# Altium PCB PracticaPCB.PcbDoc
Units mm, origin at the board's own origin, x right, y up, seen from the top; angles counter-clockwise.
Board outline 139.06 x 73.15 mm, 2 copper layers (Top Layer, Bottom Layer); 33 components, 23 nets, 90 pads, 37 vias.
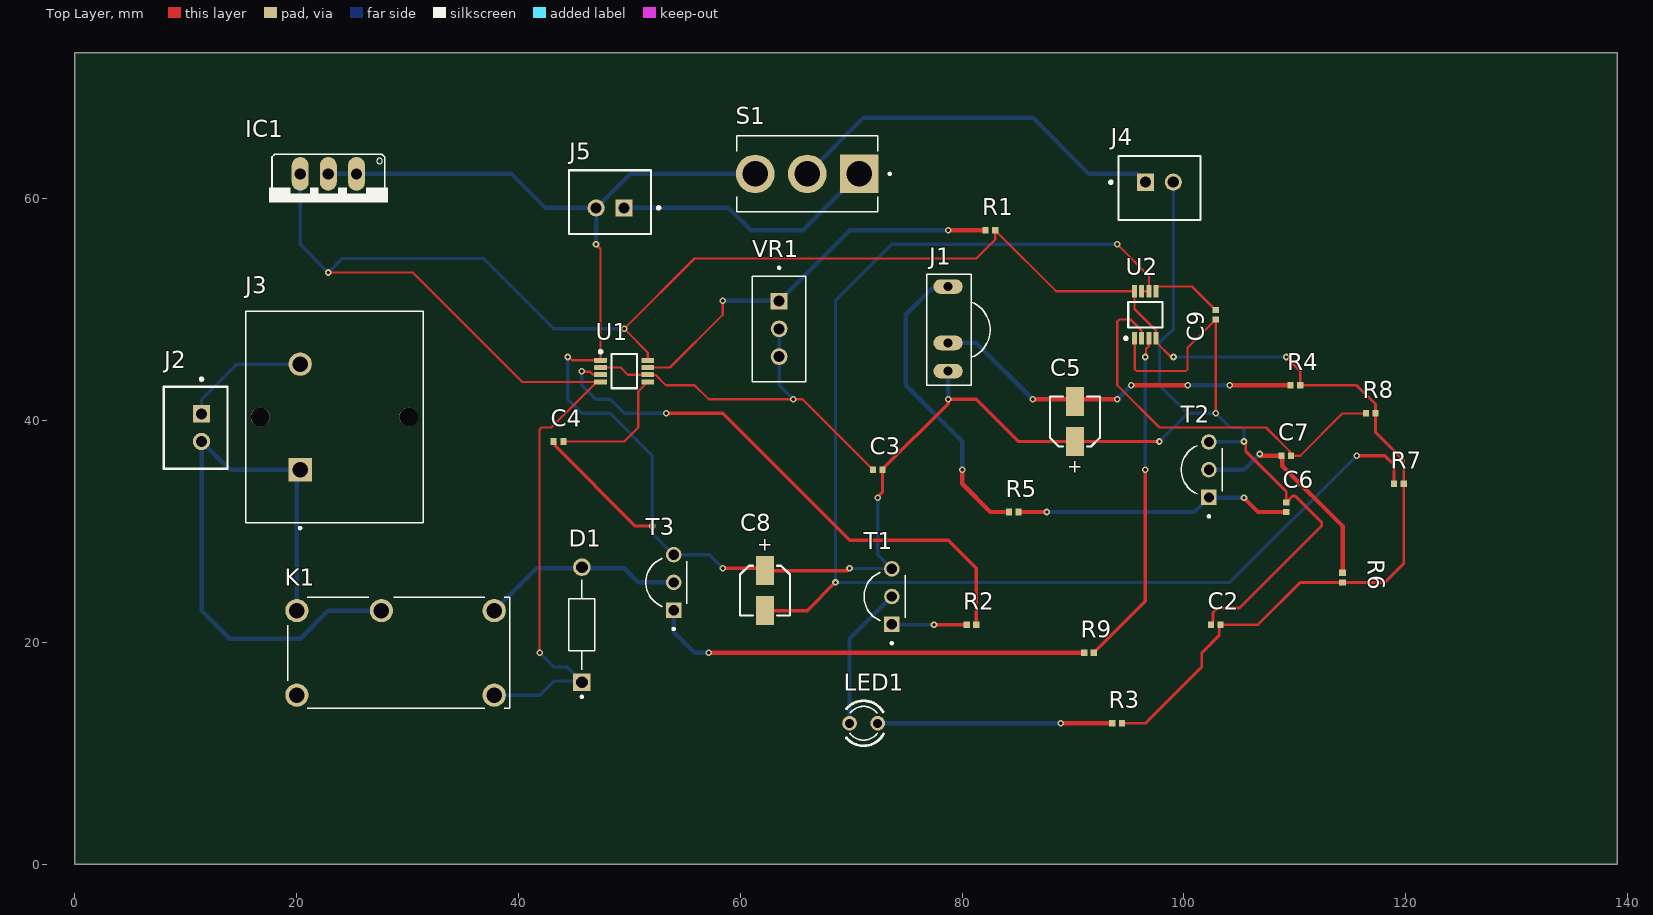
[diagram p0: Top Layer view]
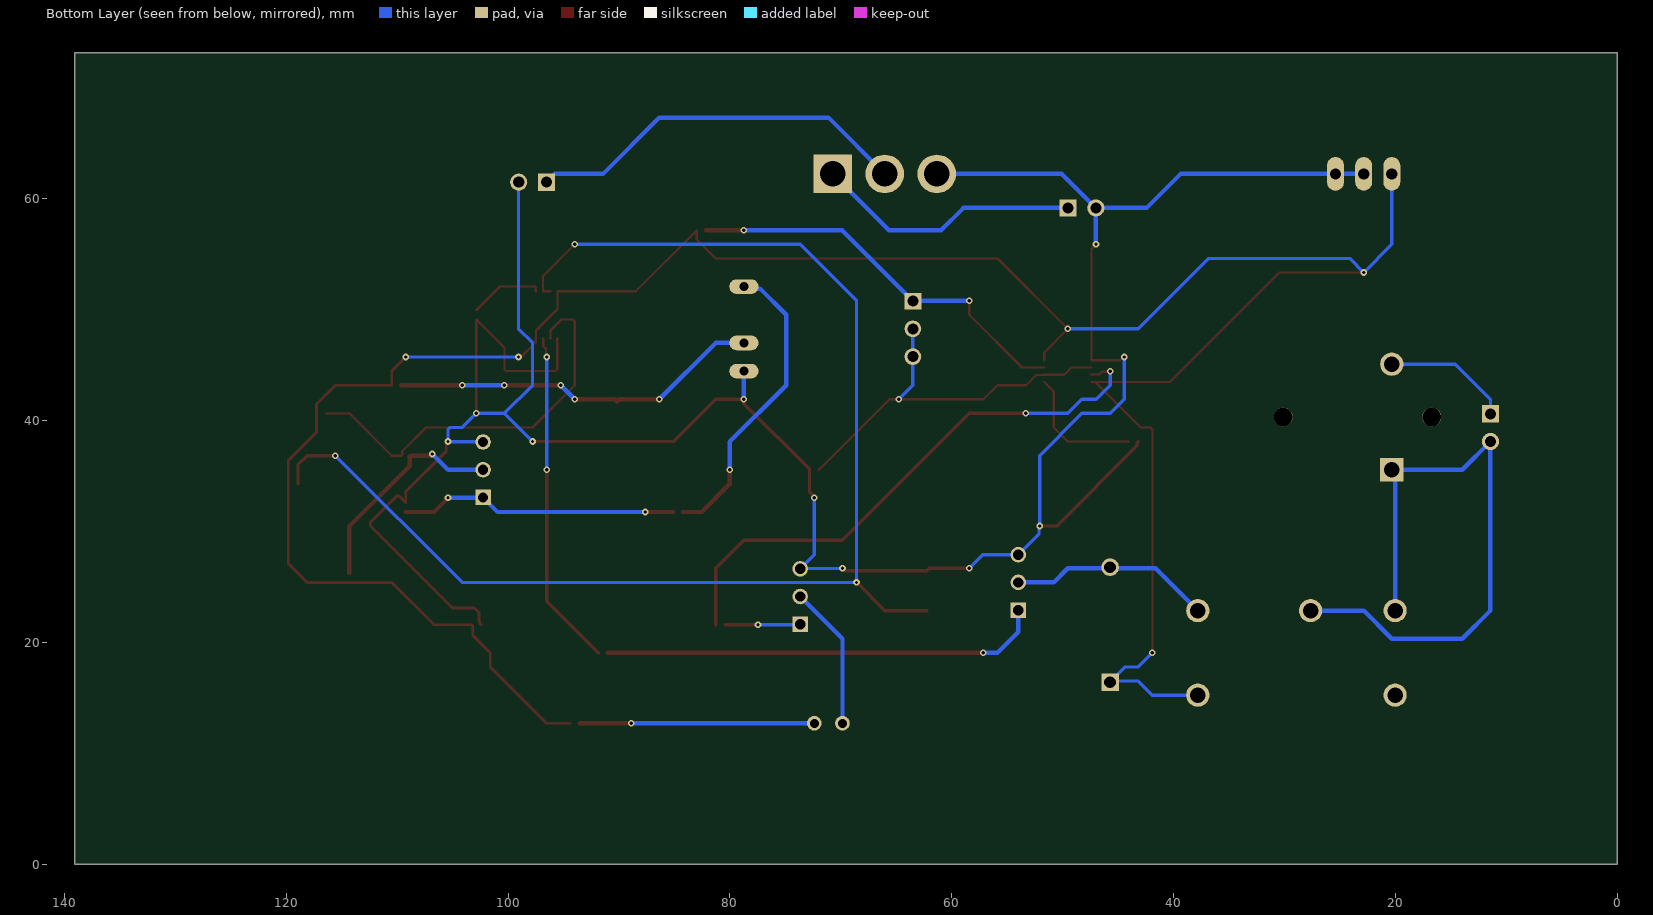
[diagram p1: Bottom Layer view, seen from below]
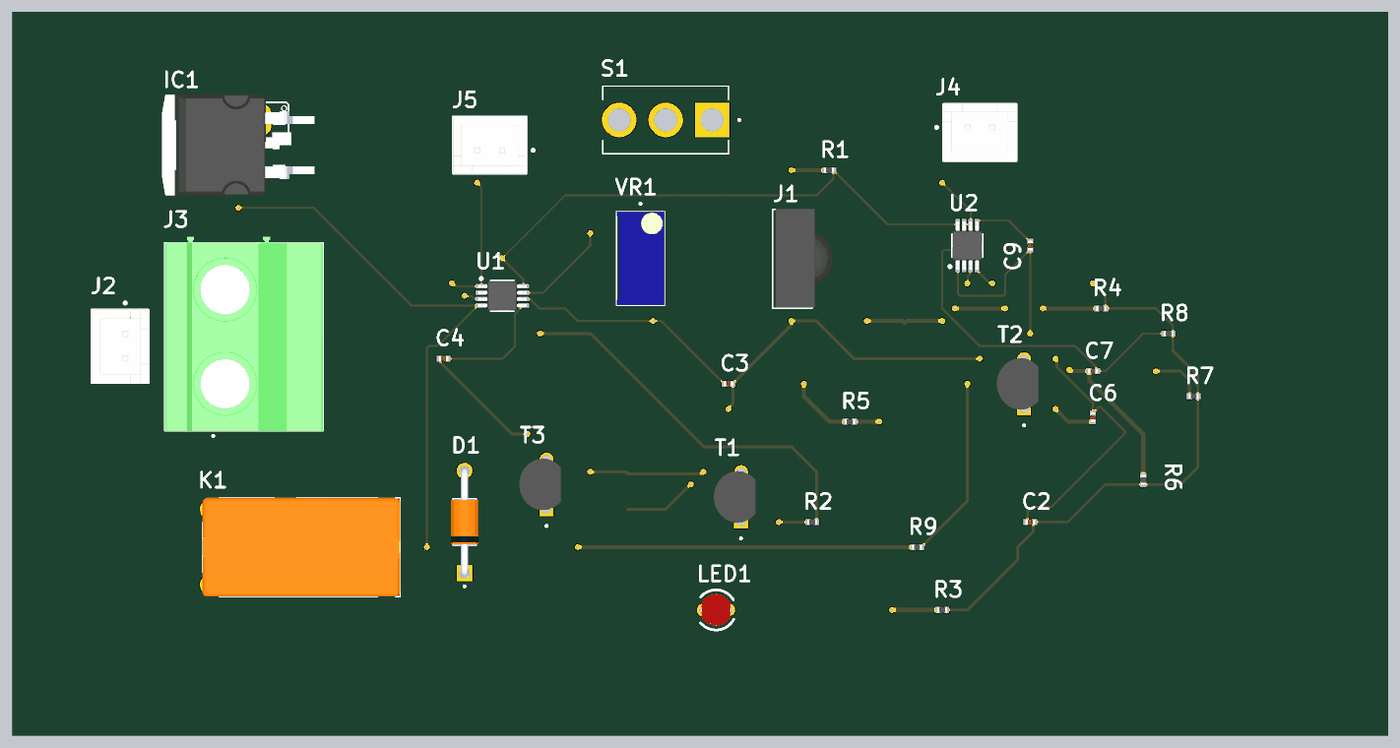
[diagram p2: 3D render of the assembled board from above, using the file's embedded part models]

## Layer stack, top to bottom
Top Solder: solder mask 0.0102, Solder Resist, Dk 3.5
Top Layer: signal copper 0.0356
Dielectric 1: dielectric 0.32, FR-4, Dk 4.8
Bottom Layer: signal copper 0.0356
Bottom Solder: solder mask 0.0102, Solder Resist, Dk 3.5

## Board outline
0,0 139.065,0 139.065,73.152 0,73.152

## Design rules (kind name [scope] priority, off if disabled: settings)
Clearance [All] p1: gap=0.3 ignorepadtopadclearanceinfootprint=FALSE
PolygonConnect [All] p1: connectstyle=Relief reliefconductorwidth=0.254 reliefentries=4 polygonreliefangle="90 Angle" airgapwidth=0.254
RoutingVias [All] p1: holewidth=0.3 width=0.6 viastyle="Through Hole" minholewidth=0.3 minwidth=0.6 maxholewidth=0.3 maxwidth=0.6
SilkToSolderMaskClearance [IsPad] p1: minsilkscreentomaskgap=0.1 clearancetoexposedcopper=TRUE
SolderMaskExpansion [All] p1: expansion=0.102 istentingtop=FALSE
SupplyNets "Schematic Supply Nets" [InNet('GND')] p1: voltage=0.000
Width [All] p1: maxlimit=0.7 minlimit=0.2 preferedwidth=0.4 minimp=50.000000 maximp=50.000000 favimp=50.000000
29 further rules are at their usual default settings.

## Components (designator, comment, footprint, x,y, rotation, side; value= is the part's Value field where it differs from the comment)
C2 "Capacitor" CAPC1005X55N 102.87,21.59 r0 top value=1p
C3 "Capacitor" CAPC1005X55N 72.39,35.56 r180 top value=1p
C4 "Capacitor" CAPC1005X55N 43.612,38.1 r0 top value=1p
C5 "100u/16V" WCAP-ASLI_D4H5.5 1360.17,-1230.1 r270 top
C6 "Capacitor" CAPC1005X55N 109.22,32.182 r270 top value=1p
C7 "Capacitor" CAPC1005X55N 109.22,36.83 r0 top value=1p
C8 "100u/16V" WCAP-ASLI_D4H5.5 -1207.77,1294.66 r90 top
C9 "Capacitor" CAPC1005X55N 102.87,49.53 r90 top value=1p
D1 "1N4001" DIOAD1036W78L470D235 45.72,21.59 r90 top
IC1 "7805" 78XXS 22.86,59.69 r180 top
J1 "TSOP1738" TSOP17XX 78.74,48.26 r90 top
J2 "B2B-XH-A(LF)(SN)" FP-B2B-XH-A_LF_SN-MFG 10.905,39.35 r270 top
J3 "SOLE-NOID VALVE" PHOENIX_1904147 31.42,30.8 r90 top
J4 "B2B-XH-A(LF)(SN)" FP-B2B-XH-A_LF_SN-MFG 97.79,60.96 r0 top
J5 "B2B-XH-A(LF)(SN)" FP-B2B-XH-A_LF_SN-MFG 48.26,59.69 r180 top
K1 "PE514005" RELAY_PE514005 29.21,19.05 r180 top
LED1 "IR" LED3MM 71.12,12.7 r180 top
R1 "Resistor" RESC1005X40N 82.55,57.15 r0 top value=1K
R2 "Resistor" RESC1005X40N 80.845,21.59 r0 top value=1K
R3 "Resistor" RESC1005X40N 93.98,12.7 r0 top value=1K
R4 "Resistor" RESC1005X40N 110.055,43.18 r0 top value=1K
R5 "Resistor" RESC1005X40N 84.655,31.75 r180 top value=1K
R6 "Resistor" RESC1005X40N 114.3,25.835 r270 top value=1K
R7 "Resistor" RESC1005X40N 119.38,34.29 r0 top value=1K
R8 "Resistor" RESC1005X40N 116.84,40.64 r0 top value=1K
R9 "Resistor" RESC1005X40N 91.44,19.05 r180 top value=1K
S1 "10V" SW_A101SYZQ04 66.04,62.23 r180 top
T1 "BC548" TO92250P510H770-3 73.005,24.13 r90 top
T2 "BC548" TO92250P510H770-3 101.6,35.56 r90 top
T3 "BC548" TO92250P510H770-3 53.34,25.4 r90 top
U1 "LMC555CMM/NOPB" DGK0008A_L 49.53,44.45 r0 top
U2 "LMC555CMM/NOPB" DGK0008A_L 96.52,49.53 r90 top
VR1 "20K" TRIM_PV36W203C01B00 63.5,48.26 r270 top

## Footprints (in the part's own frame and the unit in brackets; to place one, negate y for a bottom-side part, rotate by r counter-clockwise, add the part's x,y. Pads: shape width x height; smd on the part's side, far side on the other; paste and mask are expansions set on the pad)
78XXS [mil]
  oval 60x120 hole 40: GND(0,-100) IN(-100,-100) OUT(100,-100)
  silkscreen extent -210,-170 210,0, body extent -304,-201 304,201, height 181
CAPC1005X55N [mm]
  rect 0.54x0.6 smd: 1(-0.432,0) 2(0.432,0)
  body extent -0.5,-0.25 0.5,0.25, height 0.55
DGK0008A_L [mm] "TSOP, 8-Leads, Body 3.1x3.1mm, Pitch 0.65mm, IPC High Density"
  rrect22% 1.15x0.45 smd: 1(-2.125,0.975) 2(-2.125,0.325) 3(-2.125,-0.325) 4(-2.125,-0.975) 5(2.125,-0.975) 6(2.125,-0.325) 7(2.125,0.325) 8(2.125,0.975)
  silkscreen extent -2.25,-1.55 1.15,1.87, body extent -2.45,-1.5 2.45,1.5, height 0.94
DIOAD1036W78L470D235 [mm]
  round 1.59 hole 1.06: A(5.18,0)
  rect 1.59x1.59 / inner round 1.59 / far side rect 1.59x1.59 hole 1.06: C(-5.18,0)
  silkscreen extent -6.6,-1.17 4.07,1.17, body extent -5.55,-1.4 5.55,1.4, height 2.8
FP-B2B-XH-A_LF_SN-MFG [mm]
  rect 1.55x1.55 hole 1 paste-2539.97 mask+0: 1(-1.25,0.525)
  round 1.55 hole 1 paste-2539.97 mask+0: 2(1.25,0.525)
  silkscreen extent -4.5,-2.88 3.7,2.88, body extent -3.8,-2.98 3.8,2.98, height 0.25
LED3MM [mil]
  round 52 hole 32: A(-50,0) K(50,0)
  silkscreen extent -71,-80 61,80, body extent -60,-62 60,62, height 240
PHOENIX_1904147 [mm]
  rect 2.1x2.1 / inner round 2.1 / far side rect 2.1x2.1 hole 1.4: 1(4.76,11.1)
  round 2.1 hole 1.4: 2(14.28,11.1)
  round 1.7 hole 1.7 unplated: ""(9.52,14.7) ""(9.52,1.3)
  silkscreen extent -0.6,0 19.04,16, body extent 0,0 19.61,16, height 21.7
RELAY_PE514005 [mm]
  round 2.1 hole 1.4: 11(1.56,-3.81) 12(9.18,3.81) 14(9.18,-3.81) A1(-8.6,-3.81) A2(-8.6,3.81)
  silkscreen extent -10,-5 10,5, body extent -10,-5 10,5, height 10
RESC1005X40N [mm]
  rect 0.56x0.6 smd: 1(-0.435,0) 2(0.435,0)
  body extent -0.5,-0.25 0.5,0.25, height 0.37
SW_A101SYZQ04 [mil]
  rect 137x137 / inner round 137 / far side rect 137x137 hole 91: 1(-185,0)
  round 137 hole 91: 2(0,0) 3(185,0)
  silkscreen extent -297,-135 250,135
TO92250P510H770-3 [mm]
  rect 1.4x1.4 / inner round 1.4 / far side rect 1.4x1.4 hole 0.93: 1(-2.5,-0.655)
  round 1.4 hole 0.93: 2(0,-0.655) 3(2.5,-0.655)
  silkscreen extent -4.3,-1.85 2.18,1.85, body extent -2.6,-2.1 2.6,2.09, height 5.33
TRIM_PV36W203C01B00 [mm]
  rect 1.508x1.508 / inner round 1.508 / far side rect 1.508x1.508 hole 1: 1(-2.5,0)
  round 1.508 hole 1: 2(0,0) 3(2.5,0)
  silkscreen extent -5.6,-2.41 4.76,2.42, body extent -4.76,-2.41 4.76,2.42, height 11.55
TSOP17XX [mil]
  oval 52x104 hole 32: GND(-150,0) OUT(150,0) V+(-50,0)
  silkscreen extent -200,-149 194,75, body extent -197,-165 197,63, height 1224
WCAP-ASLI_D4H5.5 [mm] "Aluminium Electrolytic V-Chip SMT Capacitors, 4x5.5mm"
  rect 2.6x1.6 smd: 1(-1268.2,-1270) 2(-1271.8,-1270)
  silkscreen extent -1272.25,-1272.25 -1267.75,-1267.75, body extent -1272.5,-1272.15 -1267.5,-1267.85, height 5.5

## Part data
C5 C8: library part a00bbbee19879c290e62620ae7e47b1, "15uF 6.3V  ±20% 3.5Ω 1206  SMD Tantalum Capacitor", Capacitance=15uF, Capacitor Type=Aluminium, Case Code (Imperial)=1206, Case Code (Metric)=3216, Dielectric Material=Tantalum, ESR (Equivalent Series Resistance)=4R, Leakage Current=900nA, Manufacturer="Wurth Electronics", Manufacturer Part Number=865080340001, Max Operating Temperature=125°C, Min Operating Temperature=-55°C, Package Quantity=2500, Supplier Part Number=732-8411-1-ND, Tolerance=20%, Voltage Rating=6.3V, Case/Package=1206, Category="Aluminum Electrolytic Capacitors", ComponentLink1Description=https://datasheet.ciiva.com:443/pdfs/VipMasterIC/IC/MIDC/MIDC-S-A0000770067/MIDC-S-A0000769932-1.pdf?src-supplier=IHS+Markit, ComponentLink1URL=https://datasheet.ciiva.com:443/pdfs/VipMasterIC/IC/MIDC/MIDC-S-A0000770067/MIDC-S-A0000769932-1.pdf?src-supplier=IHS+Markit, ComponentLink2Description=http://www.farnell.com/datasheets/1880118.pdf?src-supplier=Farnell, ComponentLink2URL=http://www.farnell.com/datasheets/1880118.pdf?src-supplier=Farnell, ComponentLink3Description=https://katalog.we-online.de/pbs/datasheet/865080340001.pdf?src-supplier=Digikey, ComponentLink3URL=https://katalog.we-online.de/pbs/datasheet/865080340001.pdf?src-supplier=Digikey, ComponentLink4Description=http://www.farnell.com/datasheets/1880118.pdf?src-supplier=Element14, ComponentLink4URL=http://www.farnell.com/datasheets/1880118.pdf?src-supplier=Element14, ComponentLink5Description=http://www.farnell.com/datasheets/1880118.pdf?src-supplier=Newark, ComponentLink5URL=http://www.farnell.com/datasheets/1880118.pdf?src-supplier=Newark, Construction=Flat, Depth=1.6mm, Dissipation Factor=8%, Features="General Purpose", Height=1.2mm, Height - Seated (Max)=0.047inch, Lead Free="Lead Free", Length=3.2mm, Mount="Surface Mount", Number of Pins=2, Packaging="Tape and Reel", Pins=2, Polarity=Polar, Pricing="1=0,18, 50=0,156, 100=0,135, 250=0,121, 500=0,105, 1000=0,1 (USD)", Radiation Hardening=No, Reach SVHC Compliant=Yes, RoHS=Yes, RoHS Compliant=Yes, Series=TAJ, Stock=3909, Supplier=Digikey, Termination=SMD/SMT, Voltage Rating (DC)=6.3V, Weight=0.000571oz, Width=0.063inch
D1: Manufacturer=Good-Ark, Supplier Part Number=4786-1N4001CT-ND, Manufacturer Part Number=1N4001, Pricing="1=0,15, 10=0,09, 100=0,0557, 500=0,0403, 1000=0,03531, 2000=0,03109 (USD)", RoHS=No, Stock=12684, Supplier=DigiKey
IC1: library part IC1, "Fixed Positive Standard Regulator, 5VBIPolar, PSSO2", Case/Package=TO-252, Dropout Voltage1-Nom=2V, Input Voltage Absolute-Max=35V, Manufacturer=onsemi, Manufacturer Part Number=MC7805BDTG, Max Supply Voltage=20V, Min Input Voltage=7.5V, Operating Temperature, TJ-Max=125°C, Operating Temperature, TJ-Min=-40°C, Output Current1-Max=1A, Output Voltage1-Max=5.25V, Output Voltage1-Min=4.75V, Output Voltage1-Nom=5V, Package Body Material=Plastic, Package Equivalence Code=SMSIP3H,.38,90TB, Package Shape=Rectangular, Peak Reflow Temperature (Cel)=260°C, Supplier Part Number=9503160, Time @ Peak Reflow Temperature-Max (s)=40s, Voltage Tolerance-Max=5%, Adjustability=FIXED, Category="Voltage Regulators - Linear", Channels=1, ComponentLink1Description=https://datasheet.ciiva.com:443/pdfs/VipMasterIC/IC/ONSM/ONSM-S-A0009067490/ONSM-S-A0009067422-1.pdf?src-supplier=IHS+Markit, ComponentLink1URL=https://datasheet.ciiva.com:443/pdfs/VipMasterIC/IC/ONSM/ONSM-S-A0009067490/ONSM-S-A0009067422-1.pdf?src-supplier=IHS+Markit, ComponentLink2Description=https://datasheet.ciiva.com/1512/1726421-1512154.pdf?src-supplier=Element14, ComponentLink2URL=https://datasheet.ciiva.com/1512/1726421-1512154.pdf?src-supplier=Element14, ComponentLink3Description=https://datasheet.ciiva.com/18428/70100553-18428182.pdf?src-supplier=Allied+Electronics, ComponentLink3URL=https://datasheet.ciiva.com/18428/70100553-18428182.pdf?src-supplier=Allied+Electronics, Height - Seated (Max)=2.51mm, JESD-30 Code=R-PSSO-G2, JESD-609 Code=e3, Length=6.54mm, Moisture Sensitivity Level=1, Number of Outputs=1, Packaging=Rail/Tube, Pins=2, Pricing="75=0,115, 750=0,111, 2250=0,109, 9375=0,106, 22500=0,103 (USD)", Qualification Status="Not Qualified", Reach SVHC Compliant=No, Regulator Type="FIXED POSITIVE SINGLE OUTPUT STANDARD REGULATOR", RoHS=Yes, RoHS Compliant=Yes, Stock=3900, Supplier="Future Electronics", Surface Mount=Yes, Technology=BIPOLAR, Terminal Finish=Tin, Terminal Form="Gull Wing", Terminal Pitch=2.29mm, Terminal Position=SINGLE, Width=6.095mm
J1: "IR Remote Receiver 38KHz 35m 3-Pin", Package="DIP-3 Vishay", Availability="Not in stock", Check_prices=https://www.snapeda.com/parts/TSOP1738./Vishay/view-part/?ref=eda, MF=Vishay, MP=TSOP1738., Price=None, SnapEDA_Link=https://www.snapeda.com/parts/TSOP1738./Vishay/view-part/?ref=snap
J2 J4 J5: library part CON2, "CONN HEADER VERT 2POS 2.5MM", Color=Natural, Contact Resistance=20mR, Current Rating=3A, Housing Color=White, Insulation Resistance=1GR, Max Operating Temperature=85°C, Max Voltage Rating (AC)=250V, Min Operating Temperature=-25°C, Connector Type="Male Pin", Contact Material=Brass, Contact Plating=Tin, Contact Type="Male Pin", Depth=5.75mm, Fastening Type=Detent, Housing Material=Polyamide, Lead Free="Lead Free", Lead Pitch=2.5mm, Length=7.4mm, Max Current Rating=3A, Max Voltage Rating (DC)=250V, Mount="Through Hole", Number of Contacts=2, Number of Positions=2, Number of Rows=1, Orientation=Straight, Packaging=Bulk, Pitch=2.5mm, REACH SVHC="No SVHC", Series=XH, Termination=Solder, Voltage Rating=250V, Voltage Rating (AC)=250V, Wire/Cable Gauge=22AWG
J3: "PCB Terminal Screw 9.52mm 10AWG 1000V 32A 2 Position Combicon Power Series", Package=None, Check_prices=https://www.snapeda.com/parts/1904147/Phoenix+Contact/view-part/?ref=eda, MF="Phoenix Contact", MP=1904147, SnapEDA_Link=https://www.snapeda.com/parts/1904147/Phoenix+Contact/view-part/?ref=snap
K1: "Shrack, Relay,miniature,PCB,SPDT,5A,5Vdc coil, 1-1393219-7", Package=None, Check_prices=https://www.snapeda.com/parts/PE514005/TE+Connectivity/view-part/?ref=eda, MF="TE Connectivity", MP=PE514005, SnapEDA_Link=https://www.snapeda.com/parts/PE514005/TE+Connectivity/view-part/?ref=snap
LED1: library part LED, "LED SM 0603 3V -/1000/-MCD GREEN", Manufacturer="Visual Communications", Manufacturer Part Number=LSM0603453V, Supplier Part Number=LSM0603453VCT-ND, Category=LEDs, ComponentLink1Description=https://datasheet.ciiva.com:443/pdfs/VipMasterIC/IC/VISU/VISU-S-A0009188582/VISU-S-A0009188582-1.pdf?src-supplier=IHS+Markit, ComponentLink1URL=https://datasheet.ciiva.com:443/pdfs/VipMasterIC/IC/VISU/VISU-S-A0009188582/VISU-S-A0009188582-1.pdf?src-supplier=IHS+Markit, ComponentLink2Description=http://www.farnell.com/datasheets/2699708.pdf?src-supplier=Farnell, ComponentLink2URL=http://www.farnell.com/datasheets/2699708.pdf?src-supplier=Farnell, ComponentLink3Description=http://www.farnell.com/datasheets/2699708.pdf?src-supplier=Newark, ComponentLink3URL=http://www.farnell.com/datasheets/2699708.pdf?src-supplier=Newark, ComponentLink4Description=https://vcclite.com/wp-content/uploads/wpallimport/files/files/LSM0603453V.pdf?src-supplier=Digikey, ComponentLink4URL=https://vcclite.com/wp-content/uploads/wpallimport/files/files/LSM0603453V.pdf?src-supplier=Digikey, Optoelectronic Device Type="SINGLE COLOR LED", Pricing="1=0,5, 10=0,291, 100=0,1218, 500=0,1086, 1000=0,1071 (USD)", Reach SVHC Compliant=Yes, RoHS=Yes, RoHS Compliant=Yes, Stock=23373, Supplier=Digikey
S1: library part switch, "Toggle Switch", Manufacturer=E-Switch, Manufacturer Part Number=100SP2T1B1M1QEH, Supplier Part Number=EG2373-ND, Category="Toggle Switches", ComponentLink1Description=https://datasheet.ciiva.com:443/pdfs/VipMasterIC/IC/ESCH/ESCH-S-A0000009934/ESCH-S-A0000009793-1.pdf?src-supplier=IHS+Markit, ComponentLink1URL=https://datasheet.ciiva.com:443/pdfs/VipMasterIC/IC/ESCH/ESCH-S-A0000009934/ESCH-S-A0000009793-1.pdf?src-supplier=IHS+Markit, ComponentLink2Description=https://datasheet.ciiva.com/2909/1012640000-jpg-2909139.pdf?src-supplier=Digikey, ComponentLink2URL=https://datasheet.ciiva.com/2909/1012640000-jpg-2909139.pdf?src-supplier=Digikey, ComponentLink3Description=https://datasheet.ciiva.com/16323/100-16323293.pdf?src-supplier=Future+Electronics, ComponentLink3URL=https://datasheet.ciiva.com/16323/100-16323293.pdf?src-supplier=Future+Electronics, JESD-609 Code=e4, Manufacturer Series=100SP2T1B1M1QEH, Pricing="1=3,17, 10=2,739, 25=2,5836, 96=2,37021, 192=2,26708, 288=2,20875, 576=2,11234, 1056=2,03137 (USD)", Reach SVHC Compliant=Yes, RoHS=Yes, RoHS Compliant=Yes, Stock=704, Supplier=Digikey, Switch Type=Toggle, Terminal Finish=Silver
T1 T2 T3: "Bipolar (BJT) Transistor NPN 30 V 100 mA 300MHz 500 mW Through Hole TO-92-3", Collector-emitter Voltage-Max=30V, DC Current Gain-Min (hFE)=110, Frequency=300MHz, Manufacturer=onsemi, Max Collector Current=100mA, Max Operating Temperature=150°C, Package Body Material=Plastic, Package Shape=Round, Package Style=CYLINDRICALMeter, Power Dissipation-Max (Abs)=625mW, ComponentLink1Description=https://datasheet.ciiva.com:443/pdfs/VipMasterIC/IC/ONSM/ONSMS29139/ONSMS26476-1.pdf?src-supplier=IHS+Markit, ComponentLink1URL=https://datasheet.ciiva.com:443/pdfs/VipMasterIC/IC/ONSM/ONSMS29139/ONSMS26476-1.pdf?src-supplier=IHS+Markit, ComponentLink2Description=https://datasheet.ciiva.com/17179/bc548-17179734.pdf?src-supplier=Future+Electronics, ComponentLink2URL=https://datasheet.ciiva.com/17179/bc548-17179734.pdf?src-supplier=Future+Electronics, ComponentLink3Description=https://datasheet.ciiva.com/982/bc546-982816.pdf?src-supplier=Digikey, ComponentLink3URL=https://datasheet.ciiva.com/982/bc546-982816.pdf?src-supplier=Digikey, ComponentLink4Description=https://datasheet.ciiva.com/7972/1868820-7972717.pdf?src-supplier=Element14, ComponentLink4URL=https://datasheet.ciiva.com/7972/1868820-7972717.pdf?src-supplier=Element14, ComponentLink5Description=https://datasheet.ciiva.com/15208/getdatasheetpartid-171976-15208731.pdf?src-supplier=Verical, ComponentLink5URL=https://datasheet.ciiva.com/15208/getdatasheetpartid-171976-15208731.pdf?src-supplier=Verical, JEDEC-95 Code=TO-92, JESD-30 Code=O-PBCY-T3, Manufacturer Part Number=BC548, Number of Elements=1, Pins=3, Polarity/Channel Type=NPN, Qualification Status="Not Qualified", RoHS=No, Supplier=Avnet, Supplier Part Number=BC548, Surface Mount=No, Terminal Form="Through Hole", Terminal Position=BOTTOM, Transistor Application=AMPLIFIER, Transistor Element Material=SILICON
U1 U2: library part LM555, "CMOS Timer, 8-pin Mini SOIC, Pb-Free", Manufacturer="Texas Instruments", PackageTopMarking=ZXTT*ZC5, PowerWise=N, Code_JEDEC=MO-187-AA, ComponentLink1Description="Datasheet URL", ComponentLink1URL=http://www.ti.com/general/docs/lit/getliterature.tsp?genericPartNumber=LMC555&fileType=pdf, CompType="Analog IC", PackageDescription="MINI SOIC, .118 x .118 x .034in, 8 Lead, .0256in Pitch", PackageReference=DGK0008A, PinCount=8, RoHS=Y
VR1: library part VR, "20 kOhms 0.5W, 1/2W PC Pins Through Hole Trimmer Potentiometer Cermet 25.0 Turn Top Adjustment", Manufacturer=Bourns, Manufacturer Part Number=PV36W203C01B00, Resistor Type=TRIMMER, Supplier Part Number=118-PV36W203C01B00-ND, Category=LDO, ComponentLink1Description=https://datasheet.ciiva.com:443/pdfs/VipMasterIC/IC/BOUR/BOUR-S-A0003720351/BOUR-S-A0003720351-1.pdf?src-supplier=IHS+Markit, ComponentLink1URL=https://datasheet.ciiva.com:443/pdfs/VipMasterIC/IC/BOUR/BOUR-S-A0003720351/BOUR-S-A0003720351-1.pdf?src-supplier=IHS+Markit, ComponentLink2Description=http://www.mouser.com/ds/2/54/v36-907345.pdf?src-supplier=Mouser, ComponentLink2URL=http://www.mouser.com/ds/2/54/v36-907345.pdf?src-supplier=Mouser, ComponentLink3Description=https://www.bourns.com/docs/Product-Datasheets/pv36.pdf?src-supplier=Digikey, ComponentLink3URL=https://www.bourns.com/docs/Product-Datasheets/pv36.pdf?src-supplier=Digikey, ComponentLink4Description=https://datasheet.octopart.com/PV36W203C01B00-Bourns-datasheet-154729827.pdf?src-supplier=Electro+Sonic, ComponentLink4URL=https://datasheet.octopart.com/PV36W203C01B00-Bourns-datasheet-154729827.pdf?src-supplier=Electro+Sonic, Pricing="1=1,53, 10=1,291, 100=1,0844, 500=0,95864, 1000=0,90877, 5000=0,80229, 10000=0,76023 (USD)", Reach SVHC Compliant=No, RoHS=Yes, RoHS Compliant=Yes, Stock=3799, Supplier=Digikey
C2 C3 C4 C6 C7 C9: SimulationGenericComponent=True
R1 R2 R3 R4 R5 R6 R7 R8 R9: SimulationGenericComponent=True, TC1=0, TC2=0

## Via types
v1: diameter 0.6, hole 0.3, Top Layer to Bottom Layer, 37 vias

## Nets (pads, with @x,y where several pads share a name; then routed paths per layer and width w, separated by ;. In a path a pad name is that pad's centre, name@x,y a point inside that pad or via, vN(x,y) a via of type N, cw(c..) or ccw(c..) an arc to the next point about the centre after c; other vN are vias at no path point)
GND: C2.1 C3.1 C4.1 C5.1 C6.1 C8.1 C9.1 IC1.GND IC1.IN J1.GND J4.2 J5.2 S1.3 T1.3 T2.3 T3.3 U1.1 U2.1 | length 239
  Top Layer w0.2: v1(44.45,45.72) 44.531,45.72 44.826,45.425 U1.1 47.405,55.465 v1(46.99,55.88) ; U2.1 95.566,47.384 95.566,44.626 95.742,44.45 100.154,44.45 100.33,44.626 100.33,46.558 102.72,48.948 102.72,48.978 102.84,49.098 C9.1 v1(102.87,40.64)
  Top Layer w0.254: C2.1 102.558,21.71 102.558,21.846 102.628,21.916 102.628,22.684 103.046,23.101 105.005,23.101 112.432,30.528 112.432,30.777 110.032,33.177 109.783,33.177 109.37,32.764 109.37,32.734 109.316,32.68 109.25,32.614 109.231,32.614 C6.1 ; v1(105.41,38.1) 105.41,38.019 105.571,37.857 105.571,37.231 109.231,33.571 C6.1@109.231,32.764
  Top Layer w0.3: C4.1 43.3,37.98 43.3,37.703 50.523,30.48 v1(52.07,30.48) ; v1(58.42,26.67) 62.02,26.67 C8.1 69.64,26.46 v1(69.85,26.67) ; v1(72.39,33.02) 72.39,33.101 72.822,33.533 C3.1 72.822,35.59 78.74,41.508 v1(78.74,41.91) 81.28,41.91 85.09,38.1 C5.1 v1(97.79,38.1)
  Bottom Layer w0.3: v1(44.45,45.72) 44.45,41.91 45.72,40.64 48.26,40.64 52.07,36.83 v1(52.07,30.48) 52.127,30.423 52.127,29.768 T3.3 57.19,27.9 v1(58.42,26.67) ; v1(69.85,26.67) 69.87,26.65 73.64,26.65 T1.3 72.39,27.9 v1(72.39,33.02) ; v1(97.79,38.1) 100.33,40.64 ; J4.2 99.06,61.465 99.06,48.26 97.79,46.99 97.79,43.18 100.33,40.64 ; T2.3 102.275,38.08 105.39,38.08 v1(105.41,38.1) 105.41,39.194 105.234,39.37 104.14,39.37 v1(102.87,40.64) 100.33,40.64
  Bottom Layer w0.4: IC1.GND IC1.IN 39.37,62.23 42.435,59.165 J5.2 ; v1(46.99,55.88) 47,55.89 47,59.155 J5.2 ; S1.3 50.075,62.23 J5.2 ; v1(78.74,41.91) J1.GND
NetC2_2: C2.2 D1.C IC1.OUT K1.A2 R1.2 R3.2 R4.2 R6.2 R7.2 R8.2 U1.4 U1.8 U2.4 U2.8 | length 241.3
  Top Layer w0.2: v1(22.86,53.34) 30.48,53.34 40.345,43.475 U1.4@47.055,43.475 ; v1(41.91,19.05) 41.91,39.194 42.086,39.37 42.95,39.37 U1.4@47.055,43.475 ; U1.4 U1.4@47.055,43.475 ; U1.8 51.655,46.135 v1(49.53,48.26) 55.88,54.61 81.28,54.61 82.985,56.315 82.985,57.13 83.115,57 83.135,57 88.48,51.655 U2.8 95.545,50.047 97.474,48.118 97.474,47.426 U2.4 97.495,47.055 98.83,45.72 v1(99.06,45.72)
  Top Layer w0.254: R3.2 96.52,12.7 101.6,17.78 101.6,19.05 103.182,20.632 103.182,21.47 C2.2 106.68,21.59 110.49,25.4 R6.2 118.11,25.4 119.815,27.105 R7.2 119.815,36.395 117.275,38.935 R8.2 117.275,41.475 115.57,43.18 R4.2 110.49,44.45 v1(109.22,45.72)
  Bottom Layer w0.3: IC1.OUT 20.32,55.88 v1(22.86,53.34) 24.13,54.61 36.83,54.61 43.18,48.26 v1(49.53,48.26) ; K1.A2 41.91,15.24 43.18,16.51 45.62,16.51 D1.C 44.35,17.78 43.18,17.78 v1(41.91,19.05) ; v1(99.06,45.72) v1(109.22,45.72)
NetC3_2: C3.2 U1.2 U1.6 VR1.2 VR1.3 | length 35.3
  Top Layer w0.2: U1.2 49.216,44.775 49.866,44.125 U1.6 51.676,44.104 52.368,44.104 53.292,43.18 55.88,43.18 57.15,41.91 v1(64.77,41.91) 65.608,41.91 71.808,35.71 71.838,35.71 71.958,35.59 C3.2
  Bottom Layer w0.3: VR1.2 VR1.3 63.5,43.18 v1(64.77,41.91)
NetC4_2: C4.2 U1.5 | length 11.7
  Top Layer w0.2: C4.2 49.53,38.1 50.8,39.37 50.8,42.62 U1.5
NetC5_2: C5.2 J1.V+ R4.1 | length 33.7
  Top Layer w0.4: v1(86.36,41.91) 89.96,41.91 C5.2 90.38,41.91 v1(93.98,41.91) ; v1(95.25,43.18) v1(100.33,43.18) ; v1(104.14,43.18) R4.1
  Bottom Layer w0.4: J1.V+ 81.28,46.99 v1(86.36,41.91) ; v1(93.98,41.91) v1(95.25,43.18) ; v1(100.33,43.18) v1(104.14,43.18)
NetC6_2: C6.2 R5.1 T2.1 | length 25.2
  Top Layer w0.4: R5.1 v1(87.63,31.75) ; v1(105.41,33.02) 106.68,31.75 C6.2
  Bottom Layer w0.4: v1(87.63,31.75) 100.945,31.75 T2.1 102.295,33.02 v1(105.41,33.02)
NetC7_1: C7.1 R6.1 T2.2 | length 20
  Top Layer w0.4: v1(106.824,36.974) 106.878,36.974 107.023,36.83 C7.1 108.85,36.768 108.85,35.93 114.3,30.48 R6.1
  Bottom Layer w0.4: T2.2 105.41,35.56 v1(106.824,36.974)
NetC7_2: C7.2 R8.1 U2.2 | length 35.9
  Top Layer w0.2: U2.2 96.174,47.426 96.174,48.118 95.187,49.106 94.156,49.106 93.98,48.93 93.98,43.18 97.79,39.37 107.389,39.37 109.532,37.227 109.532,36.95 C7.2 110.49,36.83 114.3,40.64 R8.1
NetC8_2: C8.2 R7.1 U2.6 U2.7 | length 123.5
  Top Layer w0.2: v1(93.98,55.88) 96.845,53.015 U2.6 U2.7
  Top Layer w0.3: C8.2 66.04,22.86 v1(68.58,25.4) ; v1(115.57,36.83) 118.11,36.83 118.945,35.995 R7.1
  Bottom Layer w0.3: v1(93.98,55.88) 73.66,55.88 68.58,50.8 v1(68.58,25.4) 104.14,25.4 v1(115.57,36.83)
NetC9_2: C9.2 U2.5 | length 6.6
  Top Layer w0.2: U2.5 97.495,51.995 97.57,52.07 100.732,52.07 102.84,49.962 C9.2
NetD1_A: D1.A K1.A1 T3.2 | length 18.4
  Bottom Layer w0.4: K1.A1 41.62,26.67 45.62,26.67 D1.A 45.82,26.67 49.53,26.67 50.8,25.4 T3.2
NetJ1_OUT: J1.OUT R5.2 | length 27.5
  Top Layer w0.4: v1(80.01,35.56) 80.01,34.29 82.55,31.75 R5.2
  Bottom Layer w0.4: J1.OUT 78.564,51.894 77.294,51.894 74.93,49.53 74.93,43.18 80.01,38.1 v1(80.01,35.56)
NetJ2_1: J2.1 J3.2 | length 11.5
  Bottom Layer w0.3: J2.1 11.43,41.91 14.6,45.08 J3.2
NetJ2_2: J2.2 J3.1 K1.11 K1.14 | length 56.3
  Bottom Layer w0.4: K1.14 20.03,35.27 J3.1 13.97,35.56 J2.2 11.43,22.86 13.97,20.32 20.32,20.32 22.86,22.86 K1.11
NetJ4_1: J4.1 S1.2 | length 35
  Bottom Layer w0.4: S1.2 71.12,67.31 86.36,67.31 91.44,62.23 95.795,62.23 J4.1
NetJ5_1: J5.1 S1.1 | length 24.2
  Bottom Layer w0.4: J5.1 58.945,59.165 60.96,57.15 65.659,57.15 S1.1
NetLED1_A: LED1.A R3.1 | length 21.2
  Top Layer w0.4: v1(88.9,12.7) R3.1
  Bottom Layer w0.4: LED1.A v1(88.9,12.7)
NetLED1_K: LED1.K T1.2 | length 13
  Bottom Layer w0.4: LED1.K 69.85,20.32 T1.2
NetR1_1: R1.1 U1.7 VR1.1 | length 36.4
  Top Layer w0.2: U1.7 53.665,44.775 58.42,49.53 v1(58.42,50.8)
  Top Layer w0.4: v1(78.74,57.15) R1.1
  Bottom Layer w0.4: v1(58.42,50.8) 63.46,50.8 VR1.1 69.89,57.15 v1(78.74,57.15)
NetR2_1: R2.1 T1.1 | length 6.8
  Top Layer w0.3: v1(77.47,21.59) R2.1
  Bottom Layer w0.3: T1.1 73.7,21.59 v1(77.47,21.59)
NetR2_2: R2.2 U1.3 | length 50.6
  Top Layer w0.2: v1(45.72,44.45) 45.777,44.393 46.445,44.393 46.692,44.146 47.384,44.146 U1.3
  Top Layer w0.3: v1(53.34,40.64) 58.42,40.64 69.85,29.21 78.74,29.21 81.28,26.67 R2.2
  Bottom Layer w0.3: v1(45.72,44.45) 45.72,43.18 46.99,41.91 48.26,41.91 49.53,40.64 v1(53.34,40.64)
NetR9_1: R9.1 U2.3 | length 30.4
  Top Layer w0.2: v1(96.52,45.72) 96.577,45.777 96.577,46.445 96.824,46.692 96.824,47.384 U2.3
  Top Layer w0.3: R9.1 91.875,19.07 96.52,23.715 v1(96.52,35.56)
  Bottom Layer w0.3: v1(96.52,35.56) v1(96.52,45.72)
NetR9_2: R9.2 T3.1 | length 39.8
  Top Layer w0.4: v1(57.15,19.05) R9.2
  Bottom Layer w0.4: T3.1 53.995,20.935 55.88,19.05 v1(57.15,19.05)
pads on no net: J3. K1.12

## Text inside footprints (layer, text, board x,y; h text height)
C5: Top Overlay "+" at 89.67,36.5 h1.22 r270
C8: Top Overlay "+" at 62.73,28.06 h1.22 r90
IC1: Mechanical 13 "-" at 23.495,63.502 h1.27 r180; Mechanical 13 "I" at 26.037,63.503 h1.27 r180; Mechanical 13 "O" at 20.953,63.504 h1.27 r180